# Altium PCB ExtruderBreakout.PcbDoc
Units mil, origin at the board's own origin, x right, y up, seen from the top; angles counter-clockwise.
Board outline 920 x 1340 mil, 2 copper layers (Top Layer, Bottom Layer); 19 components, 17 nets, 71 pads, 5 vias.
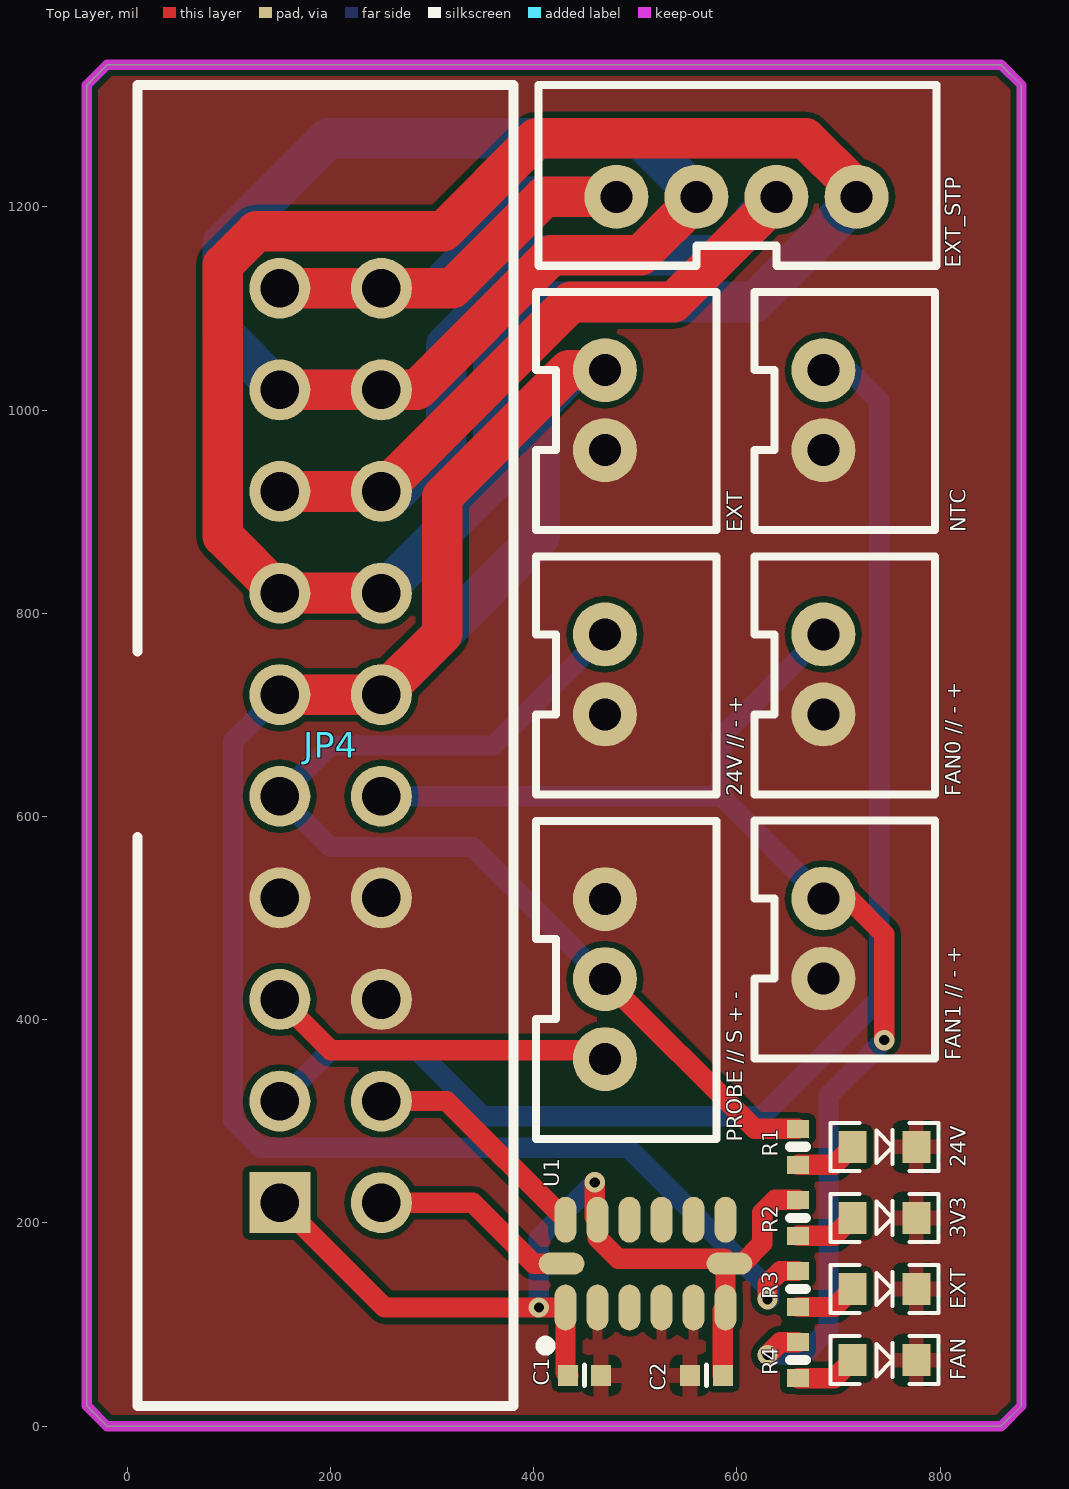
[diagram p0: Top Layer view]
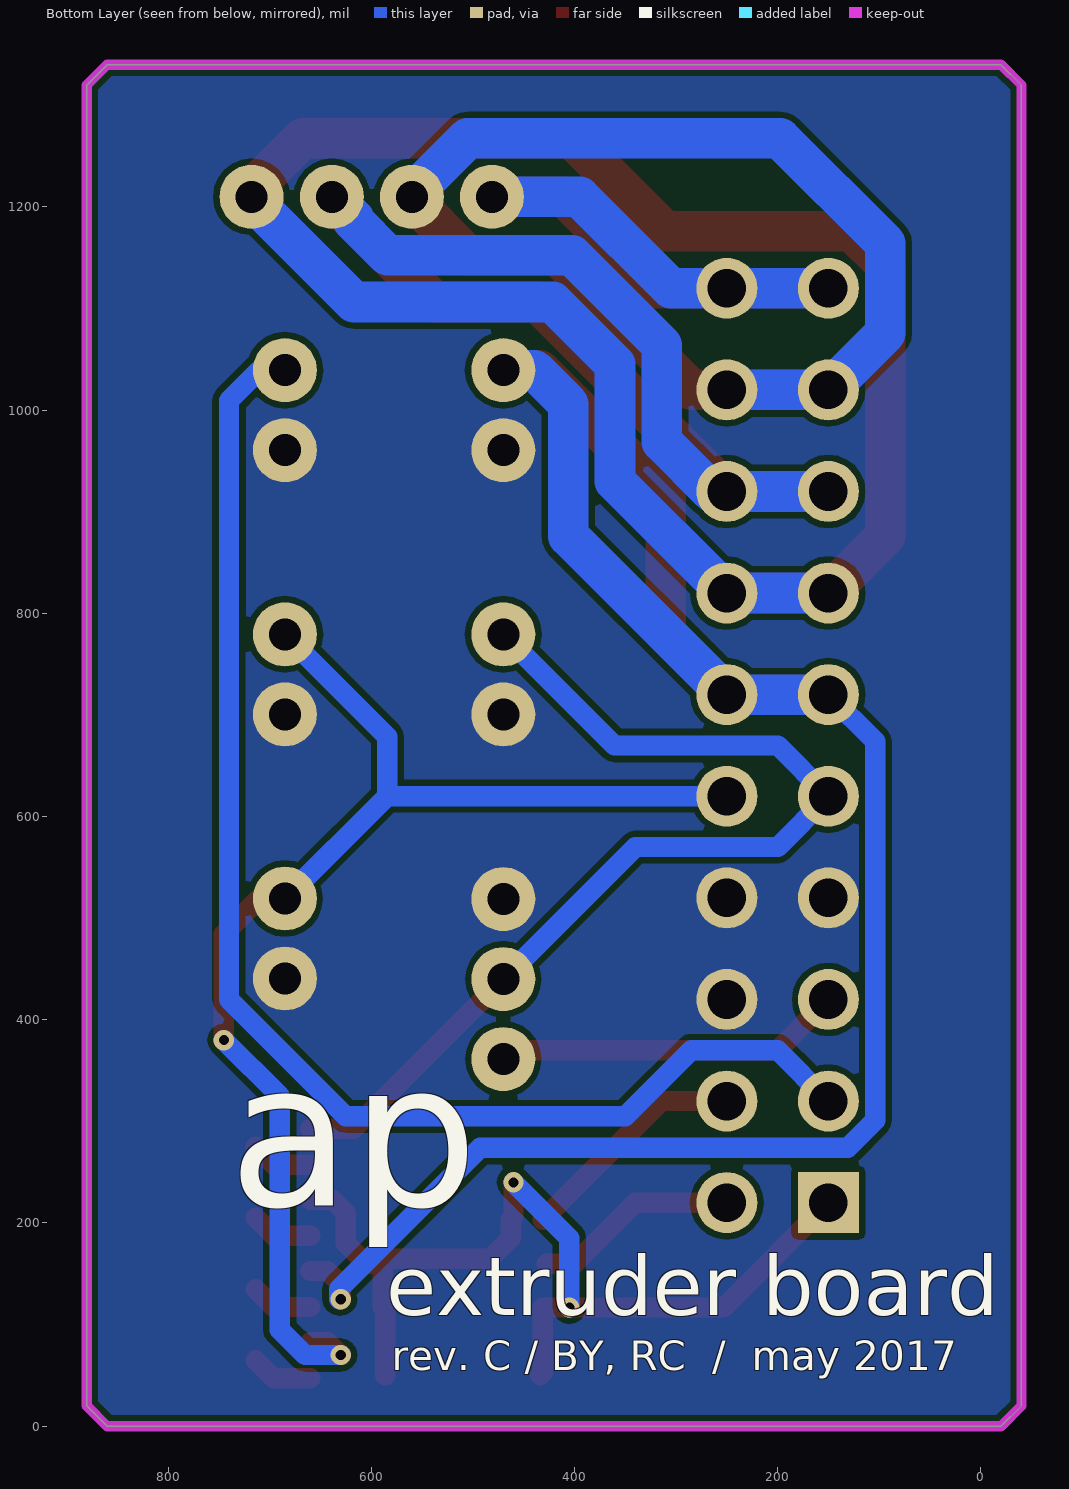
[diagram p1: Bottom Layer view, seen from below]
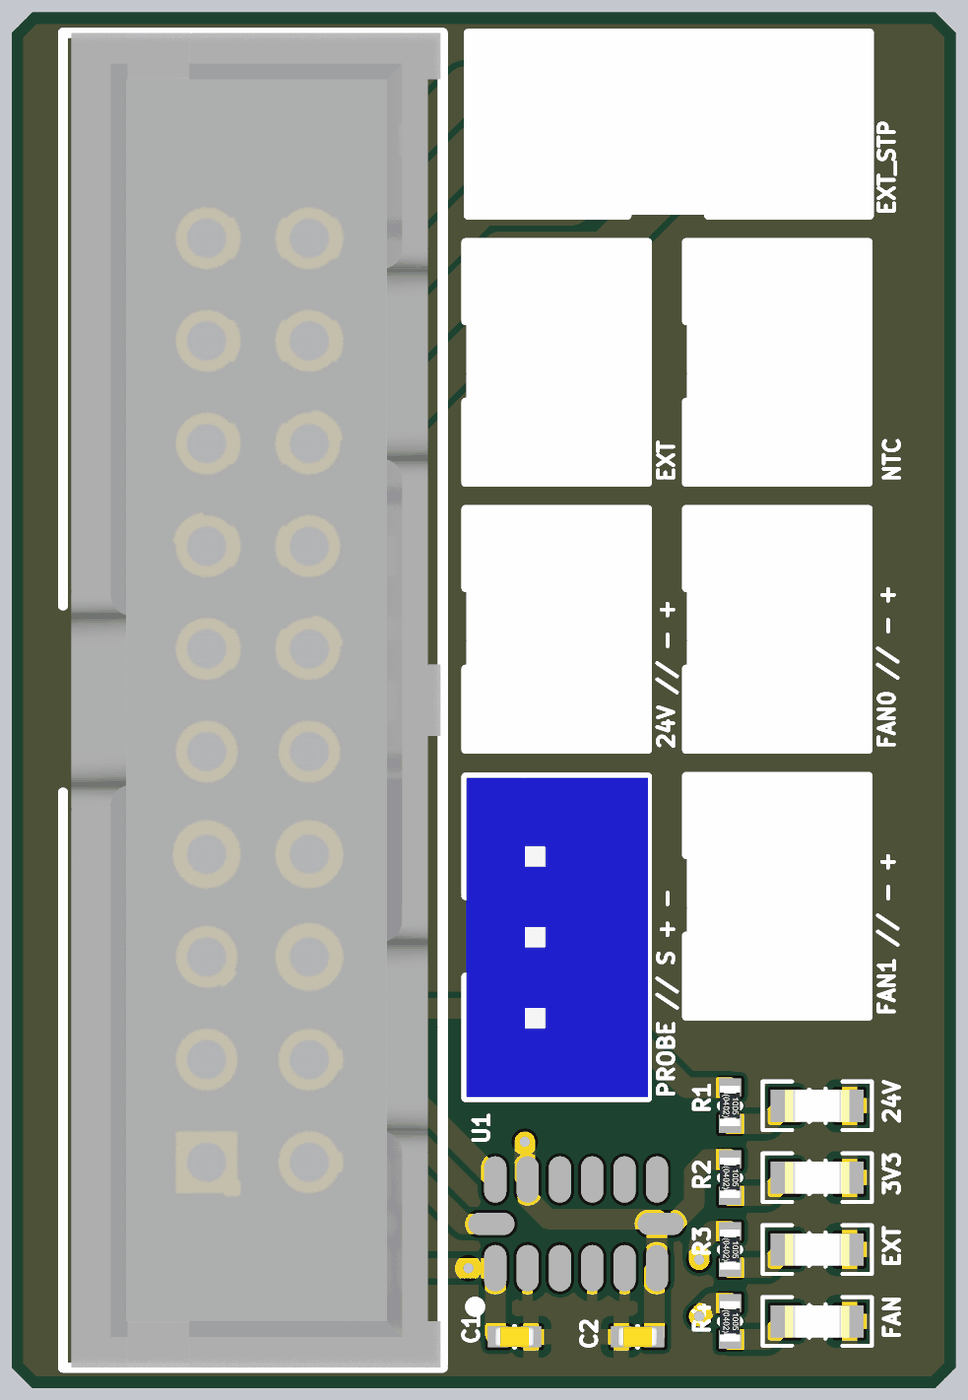
[diagram p2: 3D render of the assembled board from above, using the file's embedded part models]

## Layer stack, top to bottom
Top Solder: solder mask 0.4, Solder Resist, Dk 3.5
Top Layer: signal copper 1.4
Dielectric 1: dielectric 12.6, FR-4, Dk 4.8
Bottom Layer: signal copper 1.4
Bottom Solder: solder mask 0.4, Solder Resist, Dk 3.5

## Board outline
-40,20 -40,1320 -20,1340 860,1340 880,1320 880,20 860,0 -20,0

## Design rules (kind name [scope] priority, off if disabled: settings)
Clearance [All] p1: gap=6 ignorepadtopadclearanceinfootprint=FALSE except(0: Arc-Hole Track-Hole SMDPad-Hole THPad-Hole Via-Hole Fill-Hole Poly-Hole Region-Hole Text-Hole)
PolygonConnect ACCEL [HasFootprint('ADI-CC-14-1_V')] p1: connectstyle=Relief reliefconductorwidth=10 reliefentries=4 polygonreliefangle="90 Angle" airgapwidth=10
PolygonConnect CAP [HasFootprint('C0402[1005X55]')] p2: connectstyle=Relief reliefconductorwidth=15 reliefentries=4 polygonreliefangle="90 Angle" airgapwidth=10
PolygonConnect RES [HasFootprint('R0402[1005]')] p3: connectstyle=Relief reliefconductorwidth=15 reliefentries=4 polygonreliefangle="90 Angle" airgapwidth=10
PolygonConnect LED [HasFootprint('LED0603')] p4: connectstyle=Relief reliefconductorwidth=15 reliefentries=4 polygonreliefangle="90 Angle" airgapwidth=10
PolygonConnect [All] p5: connectstyle=Direct reliefconductorwidth=10 reliefentries=4 polygonreliefangle="90 Angle" airgapwidth=10
RoutingVias [All] p1: holewidth=10 width=20 viastyle="Through Hole" minholewidth=10 minwidth=20 maxholewidth=10 maxwidth=20
SolderMaskExpansion SolderMaskVia [IsVia] p1: expansion=1 soldermaskfromhole=TRUE
SolderMaskExpansion [All] p2: expansion=3
Width [All] p1: maxlimit=100 minlimit=10 preferedwidth=20
30 further rules are at their usual default settings.

## Classes and differential pairs
component class ExtruderBreakout: 3V3 24V "24V // - +" C1 C2 EXT EXT_STP FAN "FAN0 - +" "FAN1 // - +" JP4 NTC "PROBE // S + -" R1 R2 R3 R4 U1

## Components (designator, comment, footprint, x,y, rotation, side; value= is the part's Value field where it differs from the comment)
3V3 "LED_0603_BLUE_5mA" LED0603 745,205 r0 top (schematic designator D2)
24V "LED_0603_GREEN_5mA" LED0603 745,275 r0 top (schematic designator D1)
"24V // - +" "JST_PH_2_VERT" JST-PH-2-PTH-VERT 470,740 r270 top (schematic designator 24V)
C1 "0.1uF 6.3V 0402" C0402[1005X55] 450,50 r180 top value=0.1uF
C2 "2.2uF 6.3V 0402" C0402[1005X55] 570,50 r0 top value=2.2uF
EXT "JST_PH_2_VERT" JST-PH-2-PTH-VERT 470,1000 r270 top
EXT "LED_0603_ORANGE_5mA" LED0603 745,135 r0 top (schematic designator D3)
EXT_STP "JST_PH_4_VERT" JST-PH-4-PTH-VERT 599.37,1210 r0 top
FAN "LED_0603_ORANGE_5mA" LED0603 745,65 r0 top (schematic designator D4)
"FAN0 // - +" "JST_PH_2_VERT" JST-PH-2-PTH-VERT 685,740 r270 top (schematic designator FAN0)
"FAN1 // - +" "JST_PH_2_VERT" JST-PH-2-PTH-VERT 685,480 r270 top (schematic designator FAN1)
JP4 "EXTRUDER_OUT" IDC20 150,220 r90 top
NTC "JST_PH_2_VERT" JST-PH-2-PTH-VERT 685,1000 r270 top
"PROBE // S + -" "JST_PH_3_VERT" JST-PH-3-PTH-VERT 470,440 r270 top (schematic designator PROBE)
R1 "2K2 1% 0402" R0402[1005] 660,275 r270 top value=2K2
R2 "2K2 1% 0402" R0402[1005] 660,205 r270 top value=2K2
R3 "2K2 1% 0402" R0402[1005] 660,135 r270 top value=2K2
R4 "2K2 1% 0402" R0402[1005] 660,65 r270 top value=2K2
U1 "ADXL345BCCZ-RL7" ADI-CC-14-1_V 510,160 r90 top

## Footprints (in the part's own frame and the unit in brackets; to place one, negate y for a bottom-side part, rotate by r counter-clockwise, add the part's x,y. Pads: shape width x height; smd on the part's side, far side on the other; paste and mask are expansions set on the pad)
ADI-CC-14-1_V [mm] "QFN, 14-Leads, Body 5x3mm, Pitch 0.8mm"
  oval 1.145x0.55 smd: 1(-1.098,2) 2(-1.098,1.2) 3(-1.098,0.4) 4(-1.098,-0.4) 5(-1.098,-1.2) 6(-1.098,-2) 8(1.097,-2) 9(1.097,-1.2) 10(1.097,-0.4) 11(1.097,0.4) 12(1.097,1.2) 13(1.097,2)
  oval 0.55x1.145 smd: 7(0,-2.097) 14(0,2.098)
  silkscreen extent -2.18,2.37 -1.93,2.62, body extent -1.5,-2.5 1.5,2.5, height 1
C0402[1005X55] [mm] "Chip Capacitor, Body 1.0x0.5mm"
  rect 0.5x0.52 smd: 1(-0.41,0) 2(0.41,0)
  silkscreen extent 0,-0.25 0,0.25, body extent -0.5,-0.25 0.5,0.25, height 0.56
IDC20 [mil] "Stackable 10 pin header"
  rect 60x60 hole 38: 1(0,0)
  round 60 hole 38: 2(100,0) 3(200,0) 4(300,0) 5(400,0) 6(500,0) 7(600,0) 8(700,0) 9(800,0) 10(900,0) 11(0,-100) 12(100,-100) 13(200,-100) 14(300,-100) 15(400,-100) 16(500,-100) 17(600,-100) 18(700,-100) 19(800,-100) 20(900,-100)
  silkscreen extent -200,-230 1100,140, body extent -200,-228 1100,132, height 390
JST-PH-2-PTH-VERT [mil]
  round 63 hole 31.5: 1(-39.37,0) 2(39.37,0)
  silkscreen extent -116,-68 118,110, body extent -116,-67 116,110, height 236
JST-PH-3-PTH-VERT [mil]
  round 63 hole 31.5: 1(-78.74,0) 2(0,0) 3(78.74,0)
  silkscreen extent -156,-68 157,110, body extent -155,-67 156,110, height 236
JST-PH-4-PTH-VERT [mil]
  round 63 hole 31.5: 1(-118.11,0) 2(-39.37,0) 3(39.37,0) 4(118.37,0)
  silkscreen extent -195,-68 197,110, body extent -195,-67 195,110, height 236
LED0603 [mm]
  rect 0.7x0.8 smd: A(-0.8,0) C(0.8,0)
  silkscreen extent -1.35,-0.6 1.35,0.6, body extent -0.8,-0.4 0.8,0.4, height 0.75
R0402[1005] [mm] "Chip Resistor, Body 1.0x0.5mm"
  rect 0.45x0.55 smd: 1(-0.45,0) 2(0.45,0)
  silkscreen extent 0,-0.2 0,0.2, body extent -0.5,-0.25 0.5,0.25, height 0.35

## Part data
3V3: Manufacturer="Lite-On Inc.", PartNumber=LTST-C193TBKT-5A, Mounting Technology="Surface Mount", PackageDescription="0603 (1608 Metric)", PackageReference=0603
24V: Manufacturer="Lite-On Inc.", PartNumber=LTST-C193TGKT-5A, Mounting Technology="Surface Mount", PackageDescription="0603 (1608 Metric)", PackageReference=0603
"24V // - +" EXT "FAN0 // - +" "FAN1 // - +" NTC: Manufacturer="JST Sales America, Inc.", PartNumber=B2B-PH-K-S(LF)(SN), Mounting Technology="Through Hole", PackageReference=JST-PH
C1: library part CAP_0.1uF_6.3V_0402_10%, "0.1uF 6.3V 10% 0402 (1005 Metric)", Manufacturer=Murata, PartNumber=GRM155R70J104KA01D, Tolerance=10%, Voltage=6.3V, Mounting Technology="Surface Mount", PackageDescription="0402 (1005 Metric)", PackageReference=0402
C2: library part CAP_2.2uF_6.3V_0402_20%, "2.2uF 6.3V 20% 0402 (1005 Metric)", Manufacturer=Murata, PartNumber=GRM155R60J225ME15D, Tolerance=20%, Voltage=6.3V, Mounting Technology="Surface Mount", PackageDescription="0402 (1005 Metric)", PackageReference=0402
EXT FAN: Manufacturer="Lite-On Inc.", PartNumber=LTST-C193KFKT-5A, Mounting Technology="Surface Mount", PackageDescription="0603 (1608 Metric)", PackageReference=0603
EXT_STP: Manufacturer="JST Sales America Inc.", PartNumber=B4B-PH-K-S(LF)(SN), Mounting Technology="Through Hole", PackageReference=JST-PH
JP4: library part IDC20, Supplier Part Number 1=A97487-ND, Supplier 1=Digi-Key
R1 R2 R3 R4: library part RES_2K2_0402_1%, "2K2 0.063W 1% 0402 (1005 Metric)", Manufacturer="KOA Speer", PartNumber=RK73H1ETTP2201F, Power=0.063W, Tolerance=1%, ComponentLink1Description=Datasheet, ComponentLink1URL=http://www.koaspeer.com/catimages/Products/RK73H/RK73H.pdf, Mounting Technology="Surface Mount", PackageDescription="0402 (1005 Metric)", PackageReference=0402
U1: library part CMP-0885-00033-1, "3-Axis, +/-2 g / +/-4 g / +/-8 g / +/-16 g Digital Accelerometer with Digital Output, 1.6 KHz BW, Industrial, 14-pin LGA, Reel", Manufacturer="Analog Devices", Supply Current="140 uA", Voltage Supply (V)="2.0 to 3.6", # of Axes=3, -3dB Bandwidth="1.6 KHz", ComponentLink1Description="Manufacturer URL", ComponentLink1URL=http://www.analog.com/en/index.html, ComponentLink2Description=Datasheet, ComponentLink2URL=http://www.analog.com/static/imported-files/data_sheets/ADXL345.pdf, ComponentLink3Description="Package Specification", ComponentLink3URL=http://www.analog.com/static/imported-files/data_sheets/ADXL343.pdf, ComponentLink4Description="Product URL", ComponentLink4URL=http://www.analog.com/en/mems-sensors/mems-inertial-sensors/adxl345/products/product.html, DatasheetVersion="Rev. D", Mounting Technology="Surface Mount", Output Type=Digital, PackageDescription="14-Pin Land Grid Array, 3 x 5 mm Body, 0.8 mm Pitch", PackageReference=CC-14-1, PackageVersion="03-16-2010-A, 03/2010", Packing=Reel, PartNumber=ADXL345BCCZ-RL7, Sensitivity="256/128/64/32 LSB/g"

## Via types
v1: diameter 20, hole 10, Top Layer to Bottom Layer, 5 vias

## Nets (pads, with @x,y where several pads share a name; then routed paths per layer and width w, separated by ;. In a path a pad name is that pad's centre, name@x,y a point inside that pad or via, vN(x,y) a via of type N, cw(c..) or ccw(c..) an arc to the next point about the centre after c; other vN are vias at no path point)
3V3: C1.2 C2.2 JP4.1 R2.1 U1.1 U1.6 U1.7 U1.12 | length 957.8
  Top Layer w20: JP4.1 253.21,116.79 v1(405,116.79) U1.1 431.26,52.6 C1.2 ; v1(460,240) 460,205.96 U1.12 462.76,185.05 483.14,164.67 587.91,164.67 U1.7 ; C2.2 586.14,114.19 U1.6 588.74,156.16 U1.7 ; R2.1 637.72,222.72 625,210 625,180 605,160 U1.7
  Bottom Layer w20: v1(405,116.79) 405,185 v1(460,240)
24V: "24V // - +.1" "PROBE // S + -.2" JP4.5 R1.1 | length 1031.6
  Top Layer w20: 470,440 617.28,292.72 R1.1
  Bottom Layer w20: 470,440 340,570 200,570 JP4.5 200,670 360.63,670 470,779.37
EXTRUDER_1A: EXT_STP.4 JP4.7 JP4.17 | length 1939.6
  Top Layer w40: JP4.17 JP4.7 94,876 94,1143.2 126.8,1176 310.84,1176 402.34,1267.5 667.5,1267.5 EXT_STP.4@715,1220 ; EXT_STP.4@715,1210 EXT_STP.4
  Bottom Layer w40: JP4.7 JP4.17 360,930 360,1045 421.5,1106.5 617.01,1106.5 717.74,1207.23 EXT_STP.4
EXTRUDER_1B: EXT_STP.3 JP4.8 JP4.18 | length 1258.8
  Top Layer w40: JP4.8 JP4.18 436.5,1106.5 537.82,1106.5 EXT_STP.3@628.12,1196.8
  Bottom Layer w40: JP4.8 JP4.18 265,920 314,969 314,1064.05 402.45,1152.5 583.82,1152.5 617.5,1186.18 617.5,1188.76 EXT_STP.3
EXTRUDER_2A: EXT_STP.2 JP4.9 JP4.19 | length 1292.7
  Top Layer w40: JP4.9 JP4.19 284.95,1020 417.45,1152.5 505.08,1152.5 560,1207.42 EXT_STP.2
  Bottom Layer w40: JP4.19 JP4.9 94,1076 94,1164 197.5,1267.5 505.08,1267.5 561.29,1211.29 EXT_STP.2
EXTRUDER_2B: EXT_STP.1 JP4.10 JP4.20 | length 737.1
  Top Layer w40: JP4.10 JP4.20 319.89,1120 409.89,1210 EXT_STP.1
  Bottom Layer w40: JP4.10 JP4.20 304.89,1120 394.89,1210 EXT_STP.1
FAN: "FAN0 // - +.1" "FAN1 // - +.1" JP4.15 R4.1 | length 1281.1
  Top Layer w20: v1(630,70) 642.72,82.72 R4.1 ; 685,519.37 710,519.37 745,484.37 v1(745,380)
  Bottom Layer w20: JP4.15 584.37,620 ; v1(630,70) 665,70 690,95 690,325 v1(745,380) ; 685,519.37 584.37,620 ; 692.82,787.18 685,779.37 584.37,678.74 584.37,620
GND: 3V3.C 24V.C "24V // - +.2" "FAN0 // - +.2" "FAN1 // - +.2" "PROBE // S + -.1" C1.1 C2.1 EXT.2 EXT.C FAN.C JP4.4 JP4.13 JP4.14 NTC.2 U1.2 U1.4 U1.5
HEATER: EXT.1 JP4.6 JP4.16 R3.1 | length 2154.7
  Top Layer w20: v1(630,125) 630,140 642.72,152.72 R3.1
  Top Layer w40: JP4.6 JP4.16 310,780 310,914.95 434.42,1039.37 EXT.1
  Bottom Layer w20: JP4.6 104,674 104,300.95 130.95,274 492.77,274 631.77,135 v1@631.77,125
  Bottom Layer w40: JP4.6 JP4.16 406,876 406,1006 439.37,1039.37 EXT.1
Net3V3_A: 3V3.A R2.2 | length 60.8
  Top Layer w20: R2.2 695.79,187.28 3V3.A
Net24V_A: 24V.A R1.2 | length 60.8
  Top Layer w20: R1.2 695.79,257.28 24V.A
NetEX_A: EXT.A R3.2 | length 60.8
  Top Layer w20: R3.2 695.79,117.28 EXT.A
NetFA_A: FAN.A R4.2 | length 60.8
  Top Layer w20: R4.2 695.79,47.28 FAN.A
NTC_EXT: JP4.2 NTC.1 | length 1317.1
  Bottom Layer w20: JP4.2 200,370 285,370 350,305 625,305 740,420 740,1009.37 NTC.1@710,1039.37
PROBE: "PROBE // S + -.3" JP4.3 | length 344.3
  Top Layer w20: JP4.3 200,370 461.26,370 470,361.26
SCL: JP4.12 U1.13 | length 229.6
  Top Layer w20: JP4.12 314.47,320 U1.13
SDA: JP4.11 U1.14 | length 202.3
  Top Layer w20: JP4.11 340,220 400,160 U1.14
pads on no net: U1.3 U1.8 U1.9 U1.10 U1.11

## Polygon pours and split planes (outlines as drawn)
GND on Top Layer "Top Layer-No Net" (solid, remove dead copper, pour order 2): -90,1390 -85,1395 1180,1395 1230,1345 1230,-25 1075,-180 390,-180 35,-180 -155,10
GND on Bottom Layer "Top Layer-No Net" (solid, remove dead copper, pour order 4): -100,-145 955,-145 1265,165 1200,230 1200,1295 1060,1435 680,1435 80,1435 -205,1150

## Keep-outs
Keep-Out Layer:
  the board outline again, w10

## Silkscreen, mask and mechanical layers (free items; w line width, h text height)
Bottom Overlay:
  text "ap" at 740,160 h300
  text "extruder board" at 585,90 h100
  text "rev. C / BY, RC  /  may 2017" at 580,45 h50